# Altium PCB PCB1.PcbDoc
Units mil, origin at the board's own origin, x right, y up, seen from the top; angles counter-clockwise.
Board outline 3065 x 4050 mil, 2 copper layers (Top Layer, Bottom Layer); 39 components, 44 nets, 233 pads, 31 vias.
Unrouted connection lines stored in the file: 3.
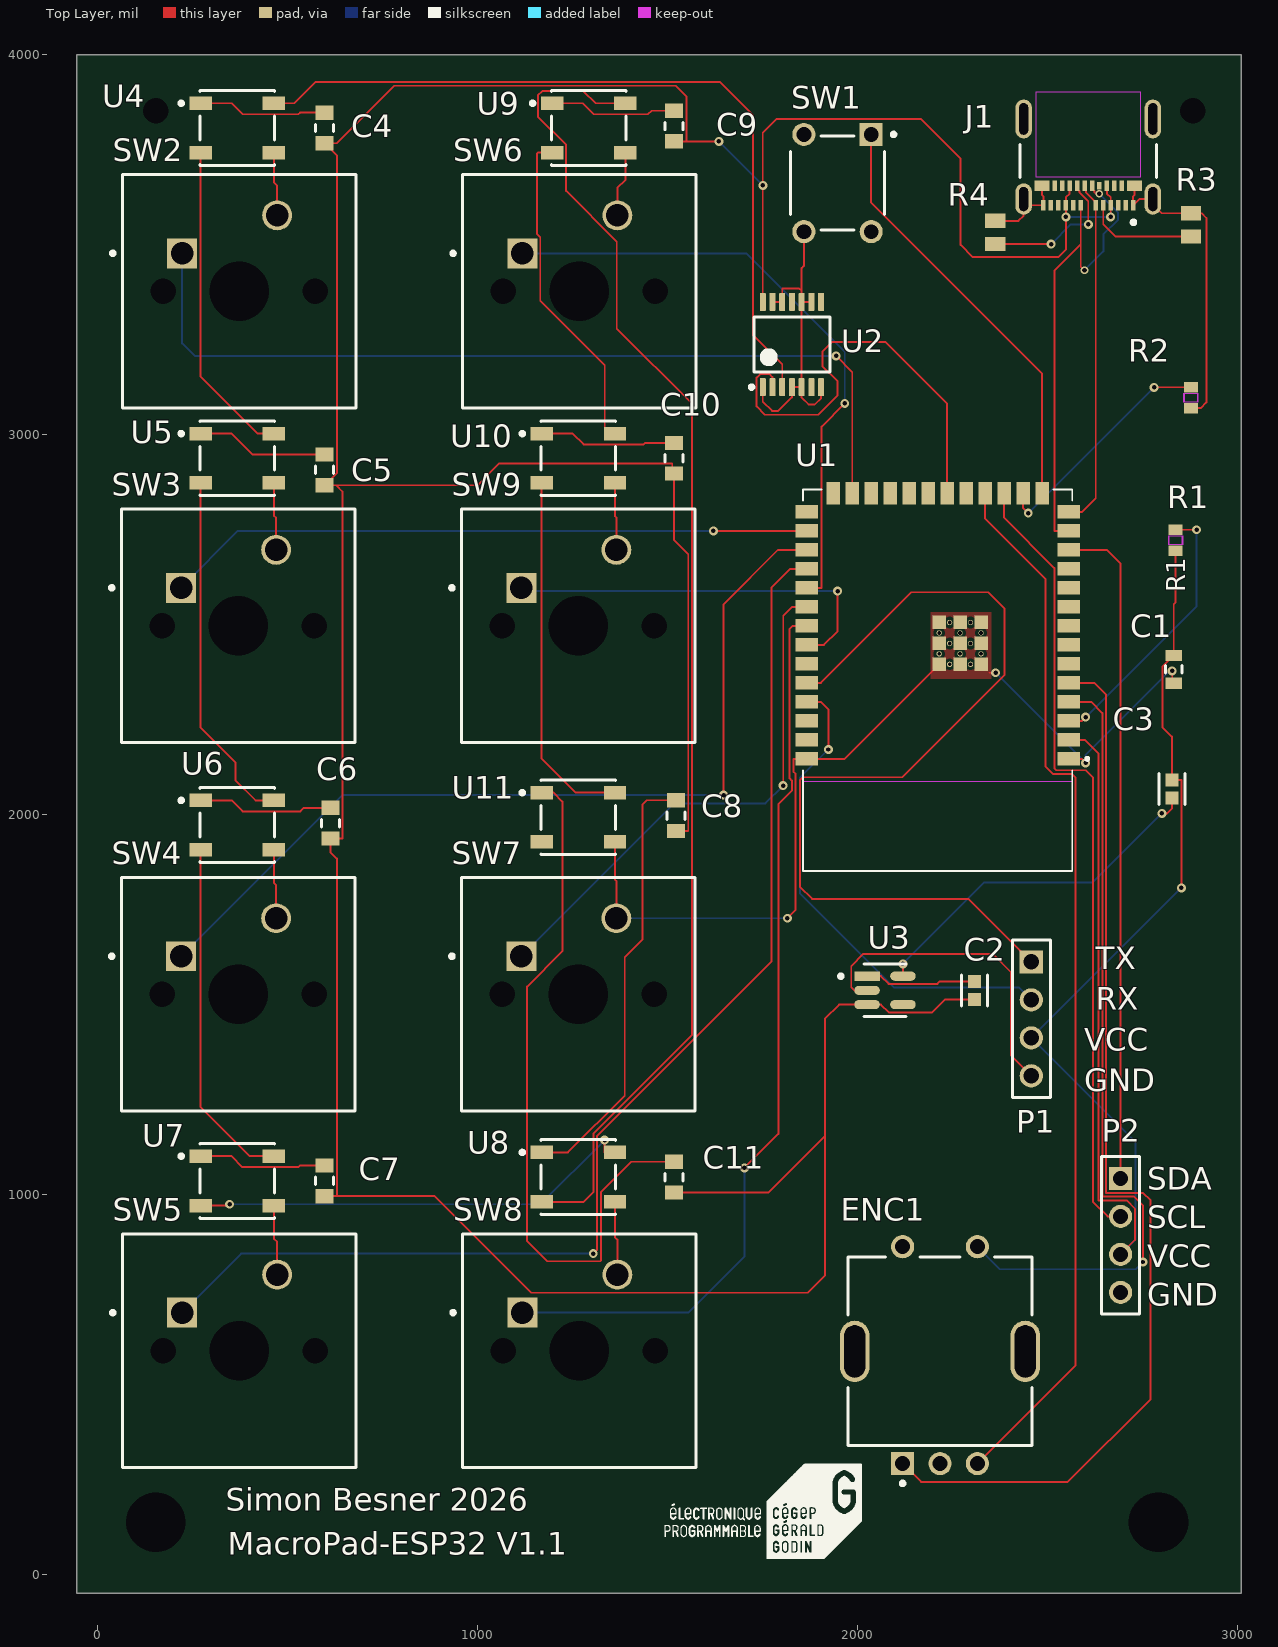
[diagram p0: Top Layer view]
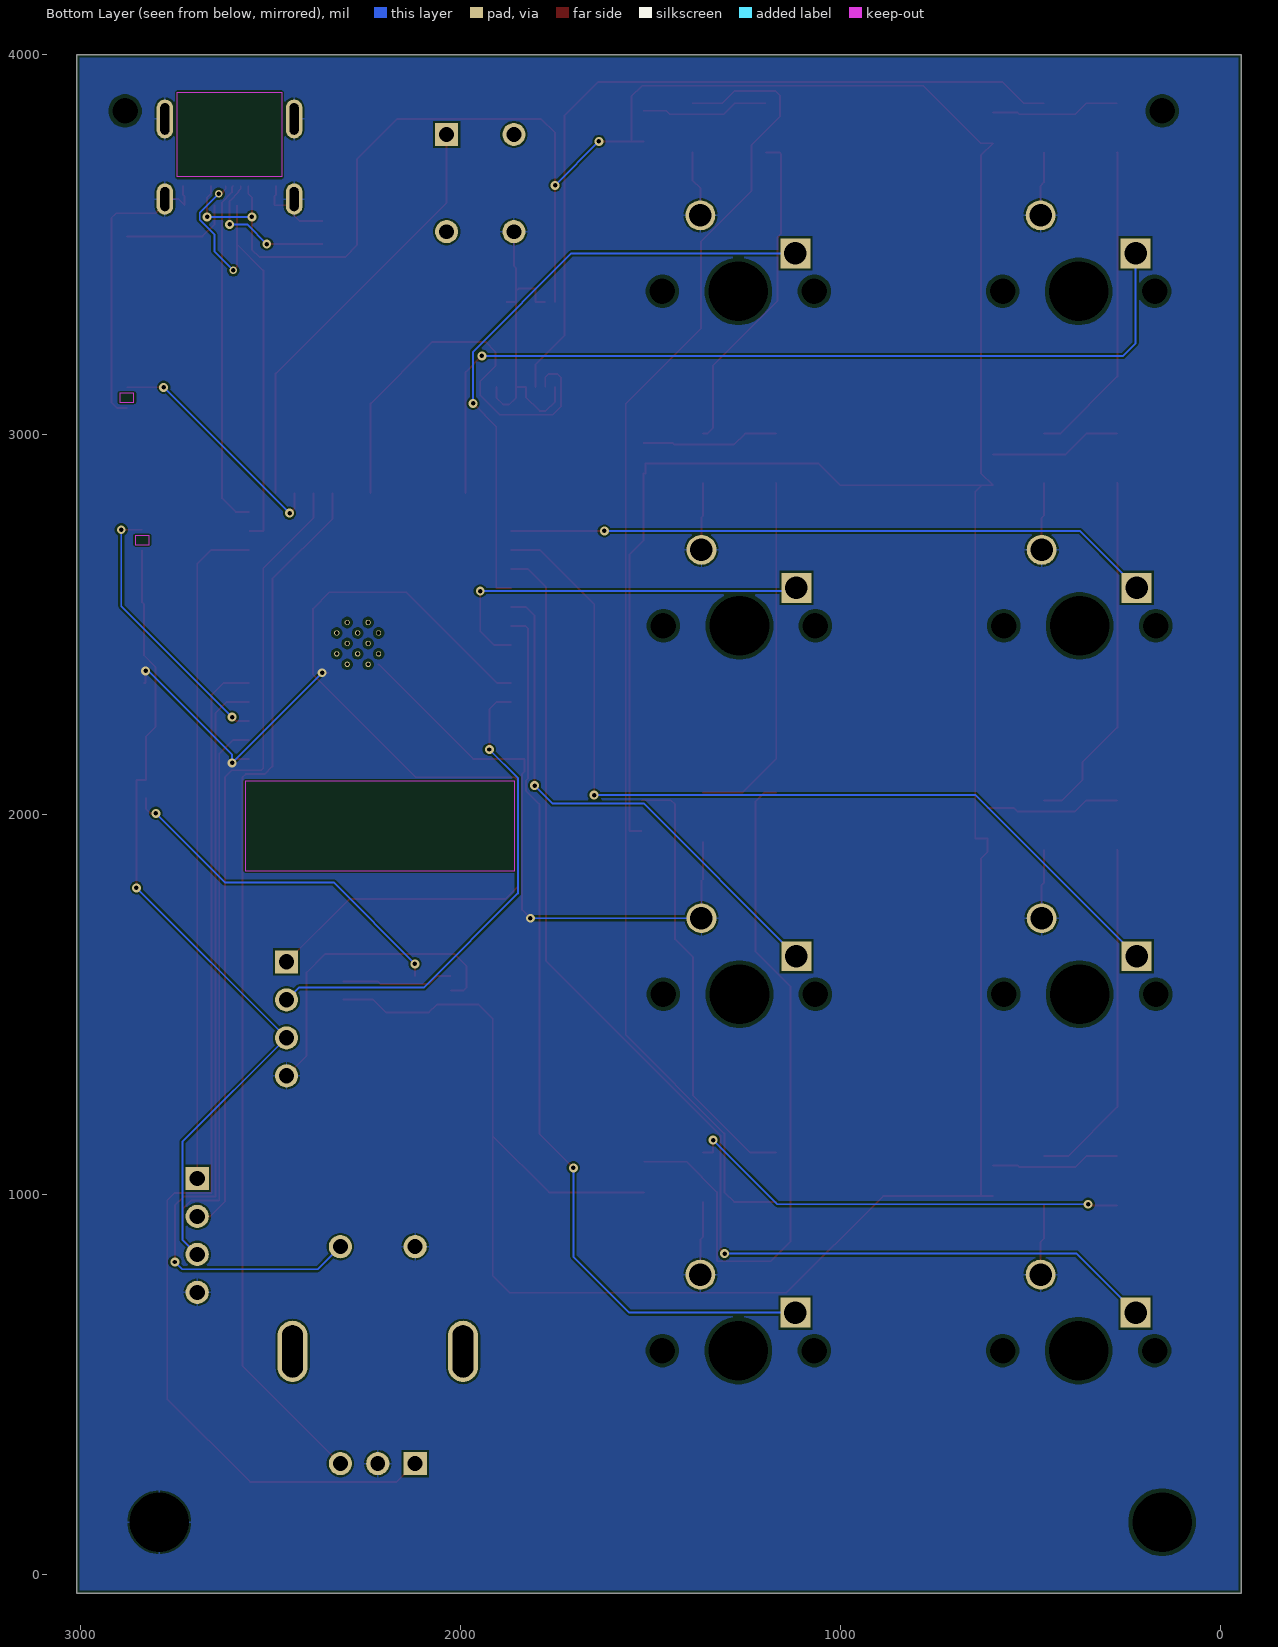
[diagram p1: Bottom Layer view, seen from below]
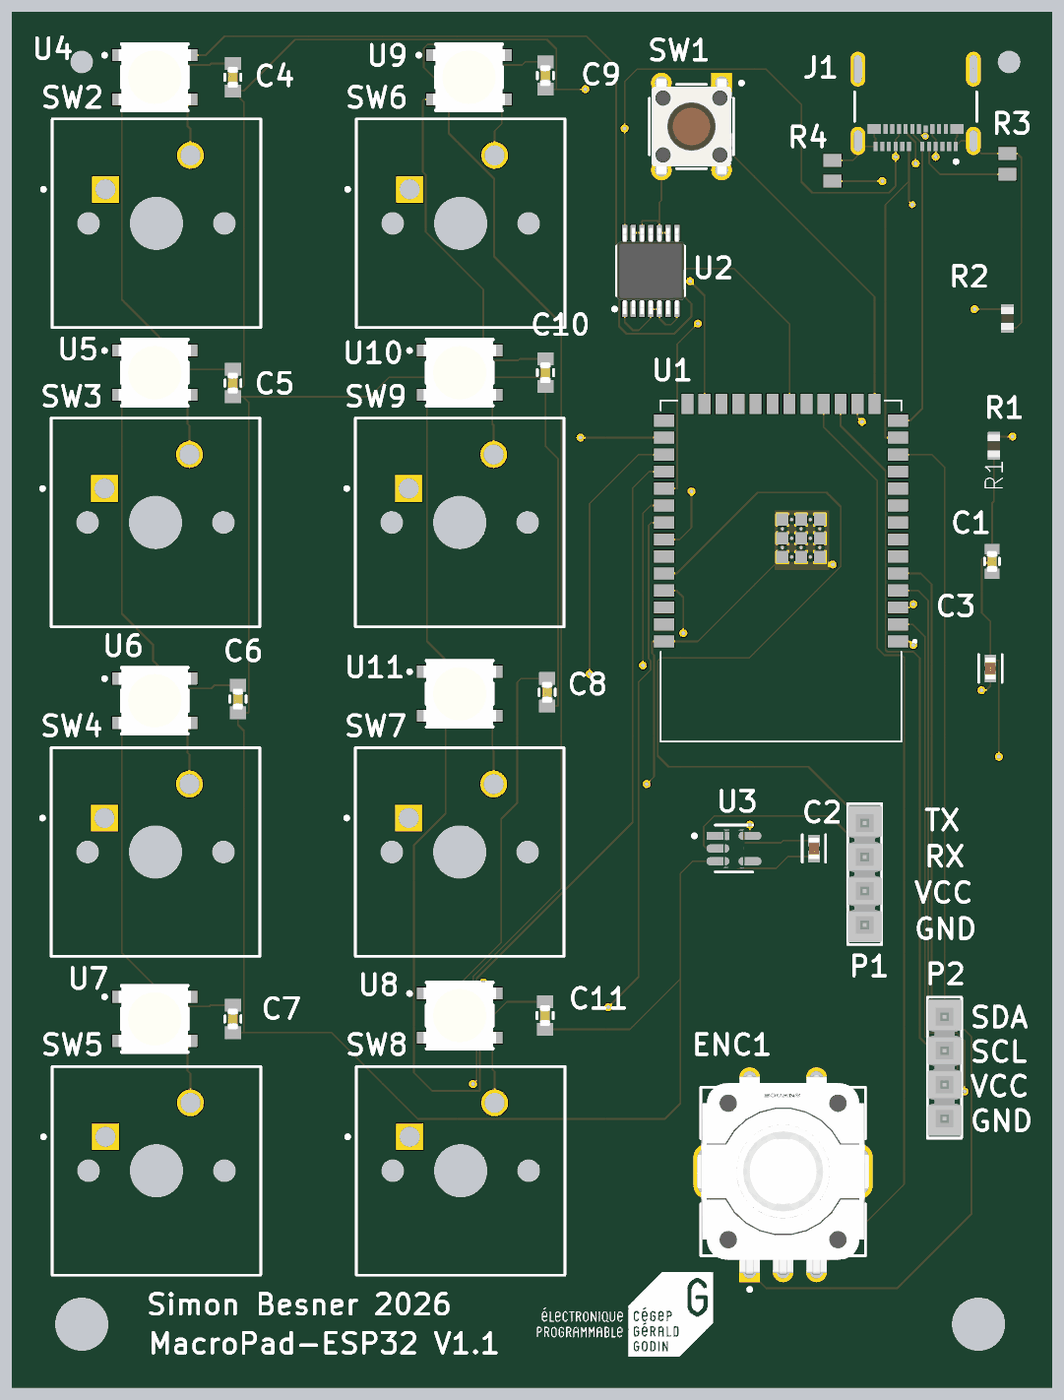
[diagram p2: 3D render of the assembled board from above, using the file's embedded part models]

## Layer stack, top to bottom
Top Solder: solder mask 0.4, Solder Resist, Dk 3.5
Top Layer: signal copper 1.4
Dielectric 1: dielectric 12.6, FR-4, Dk 4.8
Bottom Layer: signal copper 1.4
Bottom Solder: solder mask 0.4, Solder Resist, Dk 3.5

## Board outline
-55,-50 -55,4000 3010,4000 3010,-50

## Design rules (kind name [scope] priority, off if disabled: settings)
BoardOutlineClearance [All] p1: gap=7.87 ignorepadtopadclearanceinfootprint=FALSE
Clearance [All] p1: gap=5 ignorepadtopadclearanceinfootprint=FALSE except(9.84: Arc-Hole Track-Hole SMDPad-Hole THPad-Hole Via-Hole Fill-Hole Poly-Hole Region-Hole Text-Hole)
ComponentClearance [All] p1: gap=5 collisioncheckmode=3 verticalgap=5 showdistances=TRUE
DiffPairsRouting [All] p1: maxlimit=10 minlimit=5 mostfreqgap=5 toplayer_minwidth=5 toplayer_maxwidth=1000 toplayer_prefwidth=5 bottomlayer_minwidth=5 bottomlayer_maxwidth=1000 bottomlayer_prefwidth=5 maxuncoupledlength=500
Height [All] p1: minheight=0 maxheight=71497.94 prefheight=500
HoleSize [All] p1: absolutevalues=TRUE maxlimit=248.03 minlimit=11.81 maxpercent=80.000 minpercent=20.000
HoleToHoleClearance [All] p1: gap=9.84 allowstackedmicrovias=FALSE
MinimumAnnularRing [All] p1: minimumring=3
MinimumSolderMaskSliver [All] p1: minsoldermaskwidth=0
PlaneClearance [All] p1: clearance=5
PlaneConnect PlaneConnectPowerPads [InPadClass('PowerPads')] p1: planeconnectstyle=Direct reliefexpansion=20 reliefentries=4 reliefconductorwidth=10 reliefairgap=10
PlaneConnect [All] p2: pad.planeconnectstyle=Relief pad.reliefexpansion=11.81 pad.reliefentries=4 pad.reliefconductorwidth=5 pad.reliefairgap=5 via.planeconnectstyle=Direct via.reliefexpansion=11.81 via.reliefentries=4 via.reliefconductorwidth=5 via.reliefairgap=5
PolygonConnect PolygonConnect_1 [IsPolygon And OnLayer('Top Layer') And InNet('GND')] p1: connectstyle=Direct reliefconductorwidth=10 reliefentries=4 polygonreliefangle="90 Angle" airgapwidth=10
PolygonConnect PolygonConnectPowerPads [All vs (InPadClass('PowerPads'))] p2: connectstyle=Direct reliefconductorwidth=10 reliefentries=4 polygonreliefangle="90 Angle" airgapwidth=10
PolygonConnect [All] p3: thpad.connectstyle=Relief thpad.reliefconductorwidth=5 thpad.reliefentries=4 thpad.polygonreliefangle="90 Angle" thpad.airgapwidth=5 smdpad.connectstyle=Relief smdpad.reliefconductorwidth=5 smdpad.reliefentries=4 smdpad.polygonreliefangle="90 Angle" smdpad.airgapwidth=5 via.connectstyle=Direct via.reliefconductorwidth=5 via.reliefentries=4 via.polygonreliefangle="90 Angle" via.airgapwidth=5
RoutingVias [All] p1: holewidth=11.81 width=23.62 viastyle="Through Hole" minholewidth=11.81 minwidth=23.62 maxholewidth=23.62 maxwidth=259.84
SilkToSilkClearance [All] p1: silktosilkclearance=0
SilkToSolderMaskClearance [IsPad] p1: minsilkscreentomaskgap=5 clearancetoexposedcopper=TRUE
SolderMaskExpansion [All] p1: expansion=2.95 istentingtop=FALSE
Width [All] p1: maxlimit=1000 minlimit=5 preferedwidth=5 minimp=50.000000 maximp=50.000000 favimp=50.000000
20 further rules are at their usual default settings.

## Classes and differential pairs
component class ESP32: C1 C2 C3 ENC1 J1 P1 P2 R1 R2 R3 R4 SW1 U2 U3
component class Buttons: C4 C5 C6 C7 C8 C9 C10 C11 SW2 SW3 SW4 SW5 SW6 SW7 SW8 SW9 U4 U5 U6 U7 U8 U9 U10 U11

## Components (designator, comment, footprint, x,y, rotation, side; value= is the part's Value field where it differs from the comment)
C1 "100nf" FP-CGA3E-0_3-0_1-IPC_B 2832.7,2382.11 r270 top
C2 "10uf" FP-0603-L_1_6_0_15-W_0_8-IPC_C 2308.35,1537.11 r90 top
C3 "10uf" FP-0603-L_1_6_0_15-W_0_8-IPC_C 2827.7,2067.11 r90 top
C4 "100nf" FP-CGA3E-0_3-0_1-IPC_A 597.7,3807.11 r90 top
C5 "100nf" FP-CGA3E-0_3-0_1-IPC_A 597.7,2907.11 r90 top
C6 "100nf" FP-CGA3E-0_3-0_1-IPC_A 612.7,1977.11 r90 top
C7 "100nf" FP-CGA3E-0_3-0_1-IPC_A 597.7,1035.67 r90 top
C8 "100nf" FP-CGA3E-0_3-0_1-IPC_A 1522.7,1997.11 r90 top
C9 "100nf" FP-CGA3E-0_3-0_1-IPC_A 1517.7,3812.11 r90 top
C10 "100nf" FP-CGA3E-0_3-0_1-IPC_A 1517.7,2937.7 r90 top
C11 "100nf" FP-CGA3E-0_3-0_1-IPC_A 1516.76,1045.5 r90 top
ENC1 "PEC11L-4020K-S0020" FP-PEC11L-4020K-S0020-MFG 2217.47,586.83 r0 top
J1 "1054500101" FP-1054500101-MFG 2607.7,3752.11 r180 top locked
P1 "TSW-104-08-T-S" SMTC-TSW-104-08-X-S 2457.7,1612.11 r270 top
P2 "TSW-104-08-T-S" SMTC-TSW-104-08-X-S 2692.7,1042.11 r270 top
R1 "RMCF0603FT1K00" STA_RMCF0603_STP 2837.7,2722.11 r90 top
R2 "RMCF0603FT1K00" STA_RMCF0603_STP 2877.7,3097.11 r90 top
R3 "5.11k" RESC2013X70X40LL20T20 2877.7,3552.11 r90 top
R4 "5.11k" RESC2013X70X40LL20T20 2362.7,3532.11 r90 top
SW1 "2-1825910-6" FP-2-1825910-6-MFG 1947.7,3662.11 r0 top
SW2 "MX1A-11NW" CHRY-MX1A-11NW_V 372.7,3377.11 r0 top
SW3 "MX1A-11NW" CHRY-MX1A-11NW_V 369.9,2496.73 r0 top
SW4 "MX1A-11NW" CHRY-MX1A-11NW_V 369.9,1526.89 r0 top
SW5 "MX1A-11NW" CHRY-MX1A-11NW_V 372.7,588.8 r0 top
SW6 "MX1A-11NW" CHRY-MX1A-11NW_V 1268.27,3377.11 r0 top
SW7 "MX1A-11NW" CHRY-MX1A-11NW_V 1265.47,1526.89 r0 top
SW8 "MX1A-11NW" CHRY-MX1A-11NW_V 1268.27,588.8 r0 top
SW9 "MX1A-11NW" CHRY-MX1A-11NW_V 1265.47,2496.73 r0 top
U1 "ESP32-S2-SOLO-N4" XCVR_ESP32-S2-SOLO-N4 2211.32,2353.52 r180 top
U2 "SN74AHCT125PW" PW0014A_L 1827.7,3237.11 r90 top
U3 "AP2112K-3.3TRG1" FP-SOT25-IPC_A 2072.7,1537.11 r0 top
U4 "1655" ADA-RGB-1655_V 367.7,3807.11 r0 top
U5 "1655" ADA-RGB-1655_V 367.7,2937.7 r0 top
U6 "1655" ADA-RGB-1655_V 367.7,1972.11 r0 top
U7 "1655" ADA-RGB-1655_V 367.7,1035.67 r0 top
U8 "1655" ADA-RGB-1655_V 1265.47,1045.5 r0 top
U9 "1655" ADA-RGB-1655_V 1292.7,3807.11 r0 top
U10 "1655" ADA-RGB-1655_V 1265.47,2937.7 r0 top
U11 "1655" ADA-RGB-1655_V 1265.47,1992.66 r0 top

## Footprints (in the part's own frame and the unit in brackets; to place one, negate y for a bottom-side part, rotate by r counter-clockwise, add the part's x,y. Pads: shape width x height; smd on the part's side, far side on the other; paste and mask are expansions set on the pad)
ADA-RGB-1655_V [mm] "SMD, 4-Leads, Body 5x5mm"
  rect 1.5x0.9 smd: 1(-2.45,1.65) 2(-2.45,-1.65) 3(2.45,-1.65) 4(2.45,1.65)
  silkscreen extent -3.87,-2.5 2.5,2.5, body extent -2.7,-2.5 2.7,2.5, height 1.68
CHRY-MX1A-11NW_V [mm] "THD, 2-Leads, Body 15.6x15.6mm"
  rect 2x2 hole 1.499 paste-2539.97: 1(-3.81,2.54)
  round 2 hole 1.499 paste-2539.97: 2(2.54,5.08)
  round 0 hole 3.988 unplated paste-2539.97: MH1(0,0)
  round 0 hole 1.702 unplated paste-2539.97: MH2(-5.08,0) MH3(5.08,0)
  silkscreen extent -8.57,-7.8 7.8,7.8, body extent -7.8,-7.8 7.8,7.8, height 15.2
FP-2-1825910-6-MFG [mm]
  rect 1.54x1.54 hole 0.99 paste-2539.97 mask+0: 1(2.25,3.25)
  round 1.54 hole 0.99 paste-2539.97 mask+0: 2(2.25,-3.25) 3(-2.25,3.25) 4(-2.25,-3.25)
  silkscreen extent -3.14,-3.14 3.87,3.37, body extent -3.24,-4.12 3.24,4.12, height 0.25
FP-0603-L_1_6_0_15-W_0_8-IPC_C [mil]
  rect 33.77x33.94 smd paste+0 mask+0: 1(-23.71,0) 2(23.71,0)
  silkscreen extent -41,-34 41,34, body extent -45,-23 45,23, height 10
FP-1054500101-MFG [mm]
  rrect100% 1.1x2.1 hole 1.6 slot 0.6 at 0 deg paste-2539.97 mask+0: 1(-4.32,3.36) 2(4.32,3.36)
  rrect100% 1.1x2.6 hole 2.1 slot 0.6 at 0 deg paste-2539.97 mask+0: 3(-4.32,-2) 4(4.32,-2)
  rect 0.3x0.7 smd paste+0 mask+0: A1(-3,3.77) A2(-2.5,3.77) A3(-2,3.77) A4(-1.5,3.77) A5(-1,3.77) A6(-0.5,3.77) A7(0.5,3.77) A8(1,3.77) A9(1.5,3.77) A10(2,3.77) A11(2.5,3.77) A12(3,3.77) B2(2.25,2.47) B3(1.75,2.47) B4(1.25,2.47) B5(0.75,2.47) B6(0.25,2.47) B7(-0.25,2.47) B9(-1.25,2.47) B10(-1.75,2.47) B11(-2.25,2.47)
  rect 1x0.7 smd paste+0 mask+0: B1(3.1,2.47) B12(-3.1,2.47)
  rect 0.3x0.508 smd paste+0 mask+0: B8(-0.75,2.47)
  Keep-Out Layer region: -3.5,-3.77 3.5,-3.77 3.5,1.88 -3.5,1.88
  silkscreen extent -4.57,-0.3 4.57,5.03
FP-CGA3E-0_3-0_1-IPC_A [mm]
  rect 0.956x1.206 smd paste+0 mask+0: 1(-1.025,0) 2(1.025,0)
  silkscreen extent -0.25,-0.6 0.25,0.6, body extent -2,-1.1 2,1.1, height 0.25
FP-CGA3E-0_3-0_1-IPC_B [mm]
  rect 0.756x1.106 smd paste+0 mask+0: 1(-0.925,0) 2(0.925,0)
  silkscreen extent -0.25,-0.55 0.25,0.55, body extent -1.55,-0.8 1.55,0.8, height 0.25
FP-PEC11L-4020K-S0020-MFG [mm]
  round 1.55 hole 1 paste-2539.97 mask+0: 1(-2.5,7) 2(2.5,7) B(2.5,-7.5) C(0,-7.5)
  rrect100% 2x4.1 hole 3.5 slot 1.4 at 0 deg paste-2539.97 mask+0: 3(-5.7,0) 4(5.7,0)
  rect 1.55x1.55 hole 1 paste-2539.97 mask+0: A(-2.5,-7.5)
  silkscreen extent -6.15,-8.95 6.15,6.3, body extent -6.8,-8.37 6.8,7.88, height 0.25
FP-SOT25-IPC_A [mm]
  rect 1.707x0.616 smd paste+0 mask+0: 1(-1.201,0.95)
  rrect100% 1.707x0.616 smd paste+0 mask+0: 2(-1.201,0) 3(-1.201,-0.95) 4(1.201,-0.95) 5(1.201,0.95)
  silkscreen extent -3.08,-1.75 1.4,1.75, body extent -2.55,-2 2.55,2, height 0.25
PW0014A_L [mm] "SOP, 14-Leads, Body 5.1x4.5mm, Pitch 0.65mm, IPC High Density"
  rrect25% 1.2x0.4 smd: 1(-2.85,1.95) 2(-2.85,1.3) 3(-2.85,0.65) 4(-2.85,0) 5(-2.85,-0.65) 6(-2.85,-1.3) 7(-2.85,-1.95) 8(2.85,-1.95) 9(2.85,-1.3) 10(2.85,-0.65) 11(2.85,0) 12(2.85,0.65) 13(2.85,1.3) 14(2.85,1.95)
  silkscreen extent -2.97,-2.55 1.85,2.82, body extent -3.21,-2.5 3.21,2.5, height 1
RESC2013X70X40LL20T20 [mm] "Chip Resistor, 2-Leads, Body 2.00x1.25mm, IPC High Density"
  rect 0.95x1.35 smd: 1(-0.775,0) 2(0.775,0)
  body extent -1.1,-0.72 1.1,0.72, height 0.7
SMTC-TSW-104-08-X-S [mm] ".025 SQ Post Terminal Strip Assembly, 1x4 Pins, Vertical, 2.54mm Pitch, Male"
  rect 1.55x1.55 hole 1.02: 1(0,0)
  round 1.55 hole 1.02: 2(2.54,0) 3(5.08,0) 4(7.62,0)
  silkscreen extent -1.46,-1.27 9.08,1.27, body extent -1.27,-1.27 8.89,1.27, height 8.38
STA_RMCF0603_STP [mil]
  rect 27.87x37 smd paste+0 mask+0: 1(-27.44,0) 2(27.44,0)
  Top Layer keep-out region: -11.5,-16.5 -11.5,16.5 11.5,16.5 11.5,-16.5
  Keep-Out Layer region: -11.5,-18.5 -11.5,18.5 11.5,18.5 11.5,-18.5
  body extent -34,-19 34,19, height 22
XCVR_ESP32-S2-SOLO-N4 [mm]
  rect 1.5x0.9 smd: 1(-8.75,5.26) 2(-8.75,3.99) 3(-8.75,2.72) 4(-8.75,1.45) 5(-8.75,0.18) 6(-8.75,-1.09) 7(-8.75,-2.36) 8(-8.75,-3.63) 9(-8.75,-4.9) 10(-8.75,-6.17) 11(-8.75,-7.44) 12(-8.75,-8.71) 13(-8.75,-9.98) 14(-8.75,-11.25) 27(8.75,-11.25) 28(8.75,-9.98) 29(8.75,-8.71) 30(8.75,-7.44) 31(8.75,-6.17) 32(8.75,-4.9) 33(8.75,-3.63) 34(8.75,-2.36) 35(8.75,-1.09) 36(8.75,0.18) 37(8.75,1.45) 38(8.75,2.72) 39(8.75,3.99) 40(8.75,5.26)
  rect 0.9x1.5 smd: 15(-6.985,-12.5) 16(-5.715,-12.5) 17(-4.445,-12.5) 18(-3.175,-12.5) 19(-1.905,-12.5) 20(-0.635,-12.5) 21(0.635,-12.5) 22(1.905,-12.5) 23(3.175,-12.5) 24(4.445,-12.5) 25(5.715,-12.5) 26(6.985,-12.5)
  rect 0.9x0.9 smd: 41_1(-2.9,-1.06) 41_2(-1.5,-1.06) 41_3(-0.1,-1.06) 41_4(-2.9,-2.46) 41_5(-1.5,-2.46) 41_6(-0.1,-2.46) 41_7(-2.9,-3.86) 41_8(-1.5,-3.86) 41_9(-0.1,-3.86)
  round 0.35 hole 0.25 mask+0: 42_1(-2.2,-1.06) 42_2(-0.8,-1.06) 42_3(-2.9,-1.76) 42_4(-1.5,-1.76) 42_5(-0.1,-1.76) 42_6(-2.2,-2.46) 42_7(-0.8,-2.46) 42_8(-2.9,-3.16) 42_9(-1.5,-3.16) 42_10(-0.1,-3.16) 42_11(-2.2,-3.86) 42_12(-0.8,-3.86)
  Keep-Out Layer region: 9,6.75 -9,6.75 -9,12.75 9,12.75
  silkscreen extent -10.1,-12.75 9,12.75

## Part data
C1: library part CMP-08246-001006-1, "Cap Ceramic 100nF 25V X8R 20% Pad SMD 0603 +150°C Automotive T/R", Capacitance=100nF, Case Code (Imperial)=0603, Case Code (Metric)=1608, Dielectric=X8R, Max Operating Temperature=150°C, Min Operating Temperature=-55°C, Package Quantity=4000, Ratings=AEC-Q200, Tolerance=20%, Voltage Rating=25V, Case/Package=0603, Features="High Temperature", Height=0.8mm, Length=0.063inch, Mount="Surface Mount", Packaging="Tape and Reel", Thickness=0.035inch, Voltage Rating (DC)=25V, Weight=7.1E-05oz, Width=0.031inch
C2 C3: library part CMP-14477-000293-2, "AMK107ABJ106MAHT", Capacitance=10uF, Case Code (Imperial)=0603, Case Code (Metric)=1608, Dielectric=X5R, Max Operating Temperature=85°C, Min Operating Temperature=-55°C, Package Quantity=4000, Ratings=AEC-Q200, Tolerance=20%, Voltage Rating=4V, Case/Package=0603, Halogen Free="Halogen Free", Height=0.8mm, Lead Free="Lead Free", Lead/Base Style=Bayonet, Length=0.063inch, Mount="Surface Mount", Packaging="Tape and Reel", RoHS Compliant=Yes, Termination=SMD/SMT, Thickness=0.035inch, Voltage Rating (DC)=4V, Width=0.031inch
C4 C5 C6 C7 C8 C9 C10 C11: library part CMP-08246-001708-1, "Cap Ceramic 100nF 50V X7R 20% Pad SMD 0603 +125°C Automotive T/R", Capacitance=100nF, Case Code (Imperial)=0603, Case Code (Metric)=1608, Dielectric=X7R, Max Operating Temperature=125°C, Min Operating Temperature=-55°C, Package Quantity=4000, Ratings=AEC-Q200, Tolerance=20%, Voltage Rating=50V, Case/Package=0603, Height=0.8mm, Length=0.063inch, Mount="Surface Mount", Packaging="Tape and Reel", Thickness=0.031inch, Voltage Rating (DC)=50V, Weight=7.1E-05oz, Width=0.031inch
ENC1: library part CMP-07421-000057-1, "ROTARY ENCODER", Max Operating Temperature=80°C, Min Operating Temperature=-25°C, Package Quantity=75, Height=12mm, Length=24.5mm, Number of Channels=2, Output Type=Quadrature, Packaging=Bulk, RoHS Compliant=Yes, Termination="Through Hole", Width=11.8mm
J1: library part CMP-04767-000004-1, "CONN RCP USB3.1 TYPEC 24P SMD RA", Current Rating=0.25/1.25/5A, Manufacturer=Molex, Package=0, Temperature="-30°C to +85°C", Temperature Range High=+85°C, Temperature Range Low=-30°C, Voltage Rating=30V, Automotive=No, Category=Conn, ComponentLink2Description=Datasheet, ComponentLink2URL=https://www.molex.com/webdocs/datasheets/pdf/en-us/1054500101_IO_CONNECTORS.pdf, Conn Orientation="Right Angle", Contact Material=Gold,Nickel, Device Class L1=Connectors, Device Class L2="USB Connectors", Device Class L3=unset, Digikey Description="CONN RCP USB3.1 TYPEC 24P SMD RA", Footprint Url=https://www.molex.com/pdm_docs/sd/1054500101_sd.pdf, Height=3.44mm, Is Female=yes, Lead Free=Yes, Manufacturer Part Number=1054500101, Mouser Description="USB Shielded I/O Receptacle; Type C; Right Angle; Surface Mount; Gold over Nickel", Number Of Contacts=24, Octopart=https://octopart.com/105450-0101-molex-68082325, Pitch=0.5mm, RoHS=TRUE, Shielding=true, Usb Standard="USB 3.1"
P1 P2: library part CMP-1024-00356-1, "0.025\" SQ Post Header, Through-hole, Vertical, -55 to 105 degC, 2.54 mm Pitch, 4-Pin, Male, RoHS", Manufacturer=Samtec, Temperature Range="-55 to 105 degC", ComponentLink1Description="Manufacturer URL", ComponentLink1URL=http://www.samtec.com, ComponentLink2Description=Datasheet, ComponentLink2URL=http://www.samtec.com/documents/webfiles/pdf/TSW_TH.PDF, ComponentLink3Description="Package Specification", ComponentLink3URL=http://www.samtec.com/documents/webfiles/cpdf/TSW-XXX-XX-XXX-X-XX-XXX-MKT.pdf, DatasheetVersion=F-214, Mounting Technology=Through-hole, Orientation=Vertical, PackageDescription=".025[0.64] SQ. Post Terminal Strip Assembly", PackageReference=TSW-104-08-X-S, PackageVersion="DM, 8/1988", PartNumber=TSW-104-08-T-S, Pitch="2.54 mm", RoHS=True
R1 R2: library part CMP-009-00182-1, "Description", Manufacturer_Name="Stackpole International", Copyright="Copyright (C) 2025 Ultra Librarian. All rights reserved.", Design Item ID=RMCF0603FT1K00, Manufacturer_Part_Number=RMCF0603FT1K00, Source=RMCF0603FT1K00.SchLib
R3 R4: library part CMP-2001-00218-1, "ERJ-6ENF5111V", Manufacturer=Panasonic, Part Number=ERJ-6ENF5111V
SW1: library part CMP-03407-000025-1, "SWITCH TACTILE SPST-NO 0.05A 24V", Actuator Color=Brown, Contact Current Rating=50mA, Max Operating Temperature=85°C, Min Operating Temperature=-35°C, Operating Force=100gf, Voltage Rating (DC)=24V, Actuator Length=0.37inch, Actuator Material=Nylon, Actuator Type=Standard, Contact Material="Copper Alloy", Contact Plating=Silver, ELV=Compliant, Illumination Type=Non-Illuminated, Lead Free="Lead Free", Length=5.99mm, Max Current Rating=50mA, Mechanical Life=100000Cycles, Mount="Through Hole", Orientation=Straight, Packaging="Loose Piece", RoHS Compliant=Yes, Series=FSMJ, Switch Function=Off-Mom, Switch Travel=0.25mm, Termination="PC Pin", Throw Configuration=SPST, Type=Switch
SW2 SW3 SW4 SW5 SW6 SW7 SW8 SW9: library part CMP-2000-06786-1, "Keylock Switch, 12 V, -10 to 70 degC, 2-Pin THD, RoHS, Bulk", Actuator Color=N/A, Illumination Color=N/R, Manufacturer=Cherry, Maximum AC Voltage Rating=12V, Maximum Contact Resistance=200mOhm, Maximum Current Rating=0.01A, Minimum Insulation Resistance=100MOhm, Operating Force=0.58N, Operating Temperature=-10to70C, Package Description="2-Pin Through Hole Device, Body 15.6 x 15.6 mm", Part No=MX1A11NW, Actuator Length=3.6mm, Actuator Material=N/A, Actuator Style=Button, Body Orientation=Straight, Contact Material=Silver/Gold, Contact Plating=N/A, COO=UK, Datasheet URL=https://cdn.sparkfun.com/datasheets/Components/Switches/MX%20Series.pdf, Datasheet Version=09/2000, Dielectric Strength=N/A, Dimension=15.6x15.6x15.2mm, ECCN=EAR99, Electrical Life=50000000Cycle, Family=MX, Housing Material=N/A, HTS=8536509065, Illumination Type=N/R, IP Rating=N/A, Manufacturer URL=http://cherryswitches.com/cn/, Maximum DC Voltage Rating=12V, Maximum Power Rating=N/A, Mechanical Life=N/A, Mounting=ThroughHole, Mounting Technology=ThroughHole, Number of Terminals=2, Operating Speed=N/A, Package Reference=MX1A-11NW, Packaging=N/A, Pole Throw Configuration=SPST, RoHS=Unknown, Row Spacing=6.35mm, Supplier=CherryElectrical, Switch Configuration=N.O., Terminal Pitch=2.54mm, Terminal Type=PCPins, Total Travel=4.06mm, Type=DesktopProfile
U1: library part CMP-030-000000-1, "WiFi 802.11b/g/n Transceiver Module 2.4GHz PCB Trace + IPEX Surface Mount", Package=None, Check_prices=https://www.snapeda.com/parts/ESP32-S2-SOLO-N4/Espressif+Systems/view-part/?ref=eda, Component Type=Standard, Design Item ID=ESP32-S2-SOLO-N4, MF="Espressif Systems", MP=ESP32-S2-SOLO-N4, Pin Count=49, SnapEDA_Link=https://www.snapeda.com/parts/ESP32-S2-SOLO-N4/Espressif+Systems/view-part/?ref=snap, Source=ESP32-S2-SOLO-N4.SchLib
U2: library part CMP-0440-01088-3, "Quadruple Bus Buffer Gates With 3-State Outputs, PW0014A, TUBE", F @ Nom Voltage(Max)(Mhz)=110, Generic Part Number=SN74AHCT125, ICC @ Nom Voltage(Max)(mA)=0.02, Manufacturer="Texas Instruments", Operating Temperature Range(C)="-40 to 125", Rating=Catalog, tpd @ Nom Voltage(Max)(ns)=8.5, Voltage(Nom)(V)=5, Bits(#)=4, Code_JEDEC=MO-153, DatasheetVersion=SCLS264O, Input Type=TTL, Output Type=CMOS, PackageReference=PW0014A, PackageVersion=http://www.ti.com/lit/ml/mpds360/mpds360.pdf, VCC(Max)(V)=5.5, VCC(Min)(V)=4.5
U3: library part CMP-12756-000035-1, "IC REG LINEAR 3.3V 600MA SOT25", Case/Package=SOT-23-5, Dropout Voltage=250mV, Max Input Voltage=6V, Max Operating Temperature=85°C, Max Output Current=600mA, Min Input Voltage=2.5V, Min Operating Temperature=-40°C, Output Voltage=3.3V, Package Quantity=1, Quiescent Current=55uA, Accuracy=1.5%, Height=1.3mm, Lead Free="Lead Free", Length=3.1mm, Mount="Surface Mount", Number of Outputs=1, Number of Pins=5, Number of Regulators=1, Output Current=600mA, Output Type=Fixed, Packaging="Tape and Reel", Polarity=Positive, Width=1.7mm
U4 U5 U6 U7 U8 U9 U10 U11: library part CMP-2000-05026-1, "Intelligent Control LED Integrated Light Source, 3.5 to 5.3 V, -25 to 80 degC, 4-Pin SMD, RoHS, Tape and Reel", Color=Red,Green,Blue(RGB), Manufacturer=Adafruit-Industries-LLC, Package Description="4-Pin Surface Mount Device, Body 5 x 5 mm", Category=Optoelectronics, Configuration=Discrete, Controller Type=-, Datasheet URL=http://datasheet.octopart.com/ADA1655-Adafruit-Industries-datasheet-32028139.pdf, Datasheet Version=May-13, Family=Addressable,Specialty, Interface=-, Manufacturer URL=https://www.adafruit.com/, Mounting Type=SurfaceMount, Number of LEDs=10, Package Reference=1655, Series=Neopixel, Size / Dimension=5.00mmLx5.00mmW, Utilized LED=WS2812(5050)

## Free pads (board coordinates)
  round 0 hole 157 unplated paste-99999: 2(152.7,137.11) 3(2792.7,137.11)
  round 0 hole 67 unplated paste-99999: 4(2882.7,3852.11) 5(152.7,3852.11)

## Via types
v1: diameter 23.62, hole 11.81, Top Layer to Bottom Layer, 29 vias
v2: diameter 20, hole 12, Top Layer to Bottom Layer, 2 vias

## Nets (pads, with @x,y where several pads share a name; then routed paths per layer and width w, separated by ;. In a path a pad name is that pad's centre, name@x,y a point inside that pad or via, vN(x,y) a via of type N, cw(c..) or ccw(c..) an arc to the next point about the centre after c; other vN are vias at no path point)
GND: C1.2 ENC1.1 ENC1.C J1.1 J1.2 J1.3 J1.4 J1.A1 J1.A12 J1.B1 J1.B12 P1.4 P2.4 pad.2 pad.3 pad.4 pad.5 R2.1 R3.2 R4.2 SW1.4 SW2.2 SW3.2 SW4.2 SW5.2 SW6.2 SW7.2 SW8.2 SW9.2 U1.1 U1.40 U1.41_1 U1.41_2 U1.41_3 U1.41_4 U1.41_5 U1.41_6 U1.41_7 U1.41_8 U1.41_9 U2.1 U2.4 U2.5 U2.7 U2.9 U2.10 U2.12 U2.13 U3.2 U4.3 U5.3 U6.3 U7.3 U8.3 U9.3 U10.3 U11.3 | length 6372.8
  Top Layer w5: U7.3 464.16,883.65 472.7,875.11 SW5.2 ; U6.3 464.16,1819.85 469.9,1814.11 SW4.2 ; U5.3 464.16,2786.85 469.9,2781.11 SW3.2 ; U4.3 464.16,3663.65 472.7,3655.11 SW2.2 ; U8.3 1361.92,887.46 1368.27,881.11 SW8.2 ; U11.3 1361.92,1828.65 1365.47,1825.11 SW7.2 ; U10.3 1361.92,2785.65 1365.47,2782.11 SW9.2 ; SW6.2 1368.27,3649.11 1389.16,3670 U9.3 ; U2.1 1750.93,3086.88 1775.7,3062.11 1791.7,3062.11 1827.7,3098.11 U2.4 U2.5 ; U2.13 U2.12 1802.11,3384.52 1846.88,3384.52 1853.29,3378.11 ; v1(1815.7,1726.89) 1837.56,1748.75 1837.56,2106.87 1831.7,2112.73 1831.7,2146.43 U1.40 1966.44,2146.43 U1.41_3 ; SW1.4 1859.12,3443.94 1853.29,3438.11 1853.29,3378.11 ; U2.9 U2.10 ; U2.7 1904.47,3095.97 1887.7,3079.2 1871.7,3079.2 1853.29,3097.61 U2.5 ; U3.2 1991.7,1537.11 1983.7,1545.11 1983.7,1601.11 2015.7,1633.11 2355.7,1633.11 2404.7,1584.11 2404.7,1365.11 P1.4 ; 2347.63,2373.11 v1(2363.7,2373.11) ; R4.2 2423.7,3562.62 2437.62,3576.54 J1.2 2453.76,3603.68 J1.A12 2489.59,3627.11 2485.65,3631.05 J1.B1 ; U1.1 2590.38,2146.43 v1(2600.7,2136.11) ; J1.B12 2729.75,3631.05 2725.81,3627.11 J1.A1 2741.95,3619.83 J1.1 2777.78,3606.11 2801.27,3582.62 R3.2 2906.19,3582.62 2918.7,3570.11 2918.7,3084.67 2903.7,3069.67 R2.1 ; v1(2828.7,2378.11) 2828.7,2345.69 C1.2 ; U2.5 U2.10 ; U2.10 1853.29,3378.11
  Bottom Layer w5: SW7.2 v1(1815.7,1726.89) ; v1(2363.7,2373.11) v1(2600.7,2136.11) 2600.7,2156.75 2822.06,2378.11 v1(2828.7,2378.11)
NetC1_1: C1.1 C3.2 P1.3 P2.3 R1.1 U1.2 | length 3706.5
  Top Layer w5: U1.2 2598.38,2196.43 2634.69,2160.12 2634.69,984.1 2708.72,984.1 2730.71,962.11 2730.71,880.12 P2.3 ; R1.1 2837.7,2558.11 2832.7,2553.11 C1.1 2802.7,2388.53 2802.7,2230.11 2827.7,2205.11 C3.2 2852.7,2090.82 v1(2852.7,1807.11)
  Bottom Layer w5: P2.3 2731.7,881.11 2731.7,1138.11 P1.3 v1(2852.7,1807.11)
NetC2_1: C2.1 C4.1 C5.1 C6.1 C7.1 C8.1 C9.1 C10.1 C11.1 J1.A4 J1.A9 J1.B4 J1.B9 U2.14 U3.3 | length 11162.2
  Top Layer w5: C7.1 629.7,995.32 ; C11.1 1766.7,1005.15 1914.7,1153.15 ; C9.1 1549.7,3771.76 ; C8.1 1554.7,1956.76 1554.7,2685.11 1517.7,2722.11 C10.1 1512.7,2897.35 1512.7,2924.11 1057.7,2924.11 1000.35,2866.76 628.05,2866.76 ; v1(1635.35,3771.76) 1549.7,3771.76 ; U2.14 v1(1750.93,3656.17) 1750.93,3794.11 1787.93,3831.11 2166.7,3831.11 2271.7,3726.11 2271.7,3499.11 2303.7,3467.11 2528.64,3467.11 2548.64,3487.11 v1(2548.64,3573.11) J1.A9 2548.64,3624.11 2558.49,3633.95 J1.B4 ; C2.1 2230.7,1513.4 2196.41,1479.11 2082.7,1479.11 2062.1,1499.71 U3.3 1951.7,1499.71 1914.7,1462.71 1914.7,1153.15 ; J1.B9 2656.91,3633.95 2666.76,3624.11 J1.A4 v1(2666.76,3573.11) ; 628.05,2866.76 C5.1 629.7,2898.76 629.7,3734.76 C4.1 629.7,3766.76 781.05,3918.11 1521.7,3918.11 1549.7,3890.11 1549.7,3771.76 ; 628.05,2866.76 644.7,2850.11 644.7,1936.76 C6.1 612.7,1901.11 629.7,1884.11 629.7,995.32 ; 629.7,995.32 887.49,995.32 1141.7,741.11 1869.7,741.11 1914.7,786.11 1914.7,1153.15
  Bottom Layer w5: v1(1635.35,3771.76) v1(1750.93,3656.17) ; v1(2548.64,3573.11) v1(2666.76,3573.11)
NetC2_2: C2.2 U3.1 | length 294.1
  Top Layer w5: U3.1 2061.7,1574.51 2082.1,1554.11 2210.7,1554.11 2217.41,1560.82 C2.2
NetC3_1: C3.1 U3.5 | length 938.2
  Top Layer w5: v1(2119.7,1607.11) 2119.7,1574.51 U3.5 ; v1(2801.7,2003.11) 2815.7,2003.11 2827.7,2015.11 C3.1
  Bottom Layer w5: v1(2119.7,1607.11) 2333.7,1821.11 2619.7,1821.11 v1(2801.7,2003.11)
NetC4_2: C4.2 U4.1 | length 340.3
  Top Layer w5: U4.1 352.7,3872.07 381.66,3843.11 528.7,3843.11 533.05,3847.46 C4.2
NetC5_2: C5.2 U5.1 | length 349.3
  Top Layer w5: U5.1 352.7,3002.66 407.9,2947.46 C5.2
NetC6_2: C6.2 U6.1 | length 357.3
  Top Layer w5: U6.1 352.7,2037.07 381.66,2008.11 533.7,2008.11 543.05,2017.46 C6.2
NetC7_2: C7.2 U7.1 | length 339.9
  Top Layer w5: U7.1 352.7,1100.63 381.22,1072.11 528.7,1072.11 532.62,1076.03 C7.2
NetC8_2: C8.2 U8.1 | length 1159
  Top Layer w5: U8.1 1237.89,1110.46 1387.7,1260.27 1387.7,1624.11 1434.7,1671.11 1434.7,2026.46 1445.7,2037.46 C8.2
NetC9_2: C9.2 U9.1 | length 337.3
  Top Layer w5: U9.1 1277.7,3872.07 1306.66,3843.11 1448.7,3843.11 1458.05,3852.46 C9.2
NetC10_2: C10.2 U10.1 | length 362.2
  Top Layer w5: U10.1 1250.7,3002.66 1279.25,2974.11 1437.7,2974.11 1441.65,2978.06 C10.2
NetC11_2: C11.2 U11.1 | length 1882.3
  Top Layer w5: U11.1 1200.19,2057.62 1223.7,2034.11 1223.7,1640.11 1130.7,1547.11 1130.7,877.11 1183.7,824.11 1323.7,824.11 1324.89,825.3 1324.89,1006.11 1404.64,1085.86 C11.2
NetENC1_2: ENC1.2 U1.4 | length 2107.8
  Top Layer w5: U1.4 2615.38,2296.43 2644.69,2267.12 2644.69,994.1 2728.71,994.1 2751.7,971.11 v1(2751.7,822.11)
  Bottom Layer w5: ENC1.2 2375.2,803.11 2732.7,803.11 v1(2751.7,822.11)
NetENC1_A: ENC1.A U1.5 | length 2834.2
  Top Layer w5: ENC1.A 2167.49,243.11 2553.7,243.11 2771.7,461.11 2771.7,984.1 2751.7,1004.1 2654.69,1004.1 2654.69,2315.12 2623.38,2346.43 U1.5
NetENC1_B: ENC1.B U1.18 | length 2788.7
  Top Layer w5: ENC1.B 2573.7,549.36 2573.7,2098.11 2565.42,2106.39 2515.07,2106.39 2494.7,2126.77 2494.7,2620.11 2336.32,2778.49 U1.18
NetJ1_A5: J1.A5 R3.1 | length 293.9
  Top Layer w5: J1.A5 2647.07,3553.78 2679.25,3521.6 R3.1
NetJ1_A6: J1.A6 J1.B6 U1.14 | length 921.3
  Top Layer w5: U1.14 2591.7,2796.43 2627.39,2832.11 J1.A6 2627.39,3611.56 2601.26,3637.68 2601.26,3651.46 J1.B6
NetJ1_A7: J1.A7 J1.B7 U1.13 | length 1288.5
  Top Layer w5: U1.13 2518.7,2746.43 2518.7,3431.82 2588.02,3501.13 ; J1.A7 2588.02,3501.13 ; v2(2597.7,3432.11) 2588.02,3441.79 2588.02,3501.13 ; J1.B7 2617.54,3646.99 2623.82,3640.71 2623.82,3637.98 2628.22,3633.59 2636.23,3633.59 v2(2636.28,3633.54)
  Bottom Layer w5: v2(2597.7,3432.11) 2647.74,3482.15 2647.74,3526.78 2686.07,3565.11 2686.07,3583.75 v2(2636.28,3633.54)
NetJ1_B5: J1.B5 R4.1 | length 380.3
  Top Layer w5: R4.1 v1(2509.7,3501.6) ; J1.B5 2578.17,3646.99 2584.45,3640.71 2584.45,3637.98 2607.7,3614.73 v1(2607.7,3553.11)
  Bottom Layer w5: v1(2509.7,3501.6) 2561.21,3553.11 v1(2607.7,3553.11)
NetP1_1: P1.1 U1.36 | length 2436.7
  Top Layer w5: U1.36 1903.7,2346.43 2142.38,2585.11 2344.7,2585.11 2387.7,2542.11 2387.7,2368.11 2117.7,2098.11 1856.7,2098.11 1848.7,2090.11 1848.7,1810.11 1880.7,1778.11 2291.7,1778.11 P1.1
NetP1_2: P1.2 U1.37 | length 1305.5
  Top Layer w5: U1.37 1903.7,2296.43 1923.7,2276.43 v1(1923.7,2171.11)
  Bottom Layer w5: v1(1923.7,2171.11) 1848.7,2096.11 1848.7,1792.11 2095.7,1545.11 2424.7,1545.11 P1.2
NetP2_1: P2.1 U1.12 | length 1769.5
  Top Layer w5: U1.12 2655.7,2696.43 2692.7,2659.43 P2.1
NetP2_2: P2.2 U1.17 | length 2096
  Top Layer w5: U1.17 2386.32,2781.11 2518.78,2648.65 2518.78,2121.21 2523.6,2116.39 2601.42,2116.39 2619.7,2098.11 2619.7,980.94 2658.53,942.11 P2.2
NetR1_2: R1.2 U1.3 | length 718.3
  Top Layer w5: U1.3 2591.02,2246.43 v1(2600.7,2256.11) ; R1.2 v1(2892.7,2749.55)
  Bottom Layer w5: v1(2600.7,2256.11) 2892.7,2548.11 v1(2892.7,2749.55)
NetR2_2: R2.2 U1.16 | length 623.4
  Top Layer w5: U1.16 2436.32,2806.49 v1(2449.7,2793.11) ; v1(2781.14,3124.55) R2.2
  Bottom Layer w5: v1(2449.7,2793.11) v1(2781.14,3124.55)
NetSW1_1: SW1.1 U1.15 | length 1130.8
  Top Layer w5: SW1.1 2036.28,3610.53 2486.32,3160.49 U1.15
NetSW2_1: SW2.1 U1.25 | length 2350.8
  Top Layer w5: v1(1943.7,3207.11) 1986.32,3164.49 U1.25
  Bottom Layer w5: SW2.1 222.7,3240.11 255.7,3207.11 v1(1943.7,3207.11)
NetSW3_1: SW3.1 U1.28 | length 1708.9
  Top Layer w5: v1(1621.02,2746.43) U1.28
  Bottom Layer w5: SW3.1 369.59,2746.43 v1(1621.02,2746.43)
NetSW4_1: SW4.1 U1.29 | length 2384
  Top Layer w5: v1(1647.7,2051.11) 1647.7,2553.11 1791.02,2696.43 U1.29
  Bottom Layer w5: SW4.1 644.11,2051.11 v1(1647.7,2051.11)
NetSW5_1: SW5.1 U1.30 | length 3207.2
  Top Layer w5: v1(1304.7,844.11) 1314.89,854.3 1314.89,1154.11 1774.39,1613.6 1774.39,2597.8 1823.02,2646.43 U1.30
  Bottom Layer w5: SW5.1 378.01,844.11 v1(1304.7,844.11)
NetSW6_1: SW6.1 U1.31 | length 1641.5
  Top Layer w5: U1.31 1905.7,2596.43 1905.7,3021.11 v1(1966.7,3082.11)
  Bottom Layer w5: SW6.1 1707.7,3477.11 1966.7,3218.11 v1(1966.7,3082.11)
NetSW7_1: SW7.1 U1.32 | length 1394.1
  Top Layer w5: v1(1804.7,2076.11) 1804.7,2523.11 1828.02,2546.43 U1.32
  Bottom Layer w5: SW7.1 1517.68,2029.11 1757.7,2029.11 v1(1804.7,2076.11)
NetSW8_1: SW8.1 U1.33 | length 2400.4
  Top Layer w5: v1(1702.7,1070.11) 1792.06,1159.47 1792.06,2027.47 1827.56,2062.97 1827.56,2089.25 1821.7,2095.11 1821.7,2488.43 1829.7,2496.43 U1.33
  Bottom Layer w5: SW8.1 1555.39,688.8 1702.7,836.11 v1(1702.7,1070.11)
NetSW9_1: SW9.1 U1.34 | length 1037.5
  Top Layer w5: U1.34 1912.02,2446.43 1947.7,2482.11 v1(1947.7,2588.11)
  Bottom Layer w5: SW9.1 1124.09,2588.11 v1(1947.7,2588.11)
NetU1_20: U1.20 U2.2 | length 1168.6
  Top Layer w5: U2.2 1776.52,3151.29 1768.7,3159.11 1743.7,3159.11 1734.7,3150.11 1734.7,3074.11 1756.7,3052.11 1896.7,3052.11 1947.7,3103.11 1947.7,3140.11 1907.7,3180.11 1907.7,3218.11 1933.7,3244.11 2073.7,3244.11 2236.32,3081.49 U1.20
NetU2_3: U2.3 U4.4 | length 2068.1
  Top Layer w5: U4.4 517.7,3872.07 573.74,3928.11 1637.7,3928.11 1725.7,3840.11 1725.7,3261.11 1802.11,3184.7 U2.3
NetU4_2: U4.2 U5.4 | length 845.4
  Top Layer w5: U4.2 270.7,3742.15 270.7,3153.11 421.15,3002.66 U5.4
NetU5_2: U5.2 U6.4 | length 944.7
  Top Layer w5: U5.2 270.7,2872.74 270.7,2229.11 362.7,2137.11 362.7,2090.07 415.7,2037.07 U6.4
NetU6_2: U6.2 U7.4 | length 924.7
  Top Layer w5: U6.2 270.7,1907.15 270.7,1230.11 400.18,1100.63 U7.4
NetU7_2: U7.2 U8.4 | length 1194.7
  Top Layer w5: U7.2 344.3,970.71 v1(347.7,974.11) ; v1(1334.7,1143.11) 1334.7,1110.46 U8.4
  Bottom Layer w5: v1(347.7,974.11) 1165.7,974.11 v1(1334.7,1143.11)
NetU8_2: U8.2 U9.4 | length 3556.9
  Top Layer w5: U8.2 1279.7,980.54 1304.89,1005.74 1304.89,1160.07 1564.7,1419.87 1564.7,3081.11 1366.7,3279.11 1366.7,3508.11 1233.27,3641.54 1233.27,3762.97 1159.22,3837.03 1159.22,3892.89 1170.43,3904.11 1278.7,3904.11 1310.74,3872.07 U9.4
NetU9_2: U9.2 U10.4 | length 869.8
  Top Layer w5: U9.2 1159.22,3742.15 1156.29,3739.22 1156.29,3528.44 1165.14,3519.59 1165.14,3351.77 1334.89,3182.01 1334.89,3017.88 1350.11,3002.66 U10.4
NetU10_2: U10.2 U11.4 | length 956.2
  Top Layer w5: U10.2 1168.7,2872.74 1168.7,2147.11 1258.19,2057.62 U11.4
pads on no net: ENC1.3 ENC1.4 J1.A2 J1.A3 J1.A8 J1.A10 J1.A11 J1.B2 J1.B3 J1.B8 J1.B10 J1.B11 SW1.2 SW1.3 SW2.MH1 SW2.MH2 SW2.MH3 SW3.MH1 SW3.MH2 SW3.MH3 SW4.MH1 SW4.MH2 SW4.MH3 SW5.MH1 SW5.MH2 SW5.MH3 SW6.MH1 SW6.MH2 SW6.MH3 SW7.MH1 SW7.MH2 SW7.MH3 SW8.MH1 SW8.MH2 SW8.MH3 SW9.MH1 SW9.MH2 SW9.MH3 U1.6 U1.7 U1.8 U1.9 U1.10 U1.11 U1.19 U1.21 U1.22 U1.23 U1.24 U1.26 U1.27 U1.35 U1.38 U1.39 U1.42_1 U1.42_2 U1.42_3 U1.42_4 U1.42_5 U1.42_6 U1.42_7 U1.42_8 U1.42_9 U1.42_10 U1.42_11 U1.42_12 U2.6 U2.8 U2.11 U3.4 U11.2

## Polygon pours and split planes (outlines as drawn)
GND on Top Layer "GND_L01_P001" (solid, pour order 1): 2192.7,2532.11 2352.7,2532.11 2352.7,2357.11 2192.7,2357.11
GND on Bottom Layer "GND_L02_P002" (solid, pour order 2): -55,-50 -55,4000 3010,4000 3010,-50

## Silkscreen, mask and mechanical layers (free items; w line width, h text height)
Top Overlay:
  drawing of 35 lines, arcs and shapes, not listed
  text "TX" at 2627.7,1592.11 h60
  text "RX" at 2627.7,1485.44 h60
  text "VCC" at 2597.71,1378.78 h60
  text "GND" at 2597.71,1272.11 h60
  text "SDA" at 2762.7,1012.11 h60
  text "SCL" at 2762.7,910.44 h60
  text "VCC" at 2762.7,808.78 h60
  text "GND" at 2762.7,707.11 h60
  text "Simon Besner 2026" at 337.7,167.11 h60
  text "MacroPad-ESP32 V1.1" at 342.7,52.11 h60